# EAGLE board Rocket-Control (EAGLE 7.6.0)
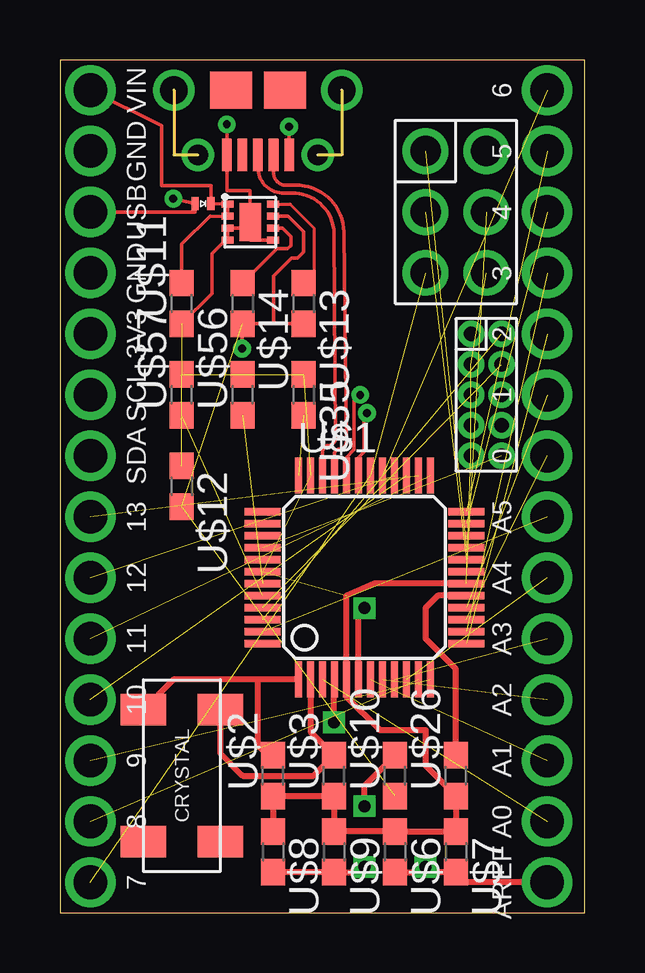
[diagram p0: board, top side]
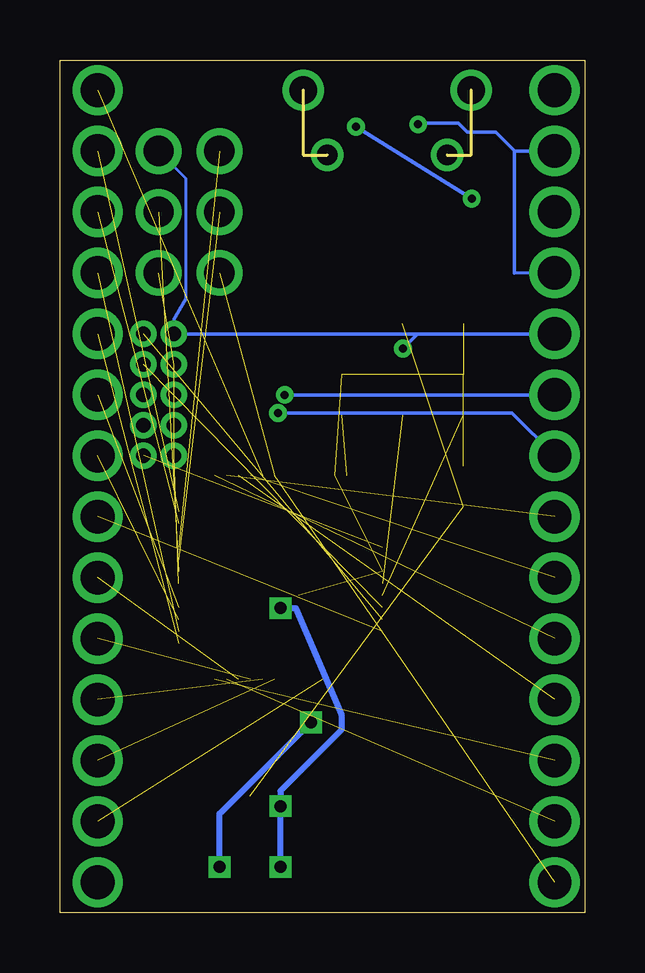
[diagram p1: board, bottom side, seen from below]

Size 21.89 x 35.55 mm. Coordinates in mm from the lower left corner, seen from the top.
Outline: 0,0 21.89,0 21.89,35.55 0,35.55 0,0
Copper layers (1*16): Top 0.035mm / dielectric 1.5mm / Bottom 0.035mm
Design rules "default": minimum track width 10mil, minimum drill 24mil, track to track 8mil, track to pad 8mil, pad to pad 8mil, via to via 8mil, smd to smd 8mil, copper to edge 40mil, drill to drill 8mil, minimum pad ring 10mil, minimum via ring 8mil, stop-mask expansion 4mil, vias tented up to drill 0mil, thermal gap 10mil

## Footprints (pad centres in the part's own frame; a part is rotated, then mirrored left to right if it is on the bottom)
TQFP48 = smd 0.3 x 1.5: 1 -2.75,-4.25; 2 -2.25,-4.25; 3 -1.75,-4.25; 4 -1.25,-4.25; 5 -0.75,-4.25; 6 -0.25,-4.25; 7 0.25,-4.25; 8 0.75,-4.25; 9 1.25,-4.25; 10 1.75,-4.25; 11 2.25,-4.25; 12 2.75,-4.25; 25 2.75,4.25; 26 2.25,4.25; 27 1.75,4.25; 28 1.25,4.25; 29 0.75,4.25; 30 0.25,4.25; 31 -0.25,4.25; 32 -0.75,4.25; 33 -1.25,4.25; 34 -1.75,4.25; 35 -2.25,4.25; 36 -2.75,4.25 | smd 1.5 x 0.3: 13 4.25,-2.75; 14 4.25,-2.25; 15 4.25,-1.75; 16 4.25,-1.25; 17 4.25,-0.75; 18 4.25,-0.25; 19 4.25,0.25; 20 4.25,0.75; 21 4.25,1.25; 22 4.25,1.75; 23 4.25,2.25; 24 4.25,2.75; 37 -4.25,2.75; 38 -4.25,2.25; 39 -4.25,1.75; 40 -4.25,1.25; 41 -4.25,0.75; 42 -4.25,0.25; 43 -4.25,-0.25; 44 -4.25,-0.75; 45 -4.25,-1.25; 46 -4.25,-1.75; 47 -4.25,-2.25; 48 -4.25,-2.75
C0603 = smd 1.1 x 1: 1 -0.85,0; 2 0.85,0
4-SOJ:CRYSTAL = smd 1.3 x 1.9: 1:CRYSTAL -2.75,1.6; 2:CRYSTAL -2.75,-1.6; 3:N/C 2.75,1.6; 4:N/C 2.75,-1.6
8-WFDFN-EXPOSED-PAD = smd 0.28 x 0.5: AGND 1.5,0; EN 1,0; FB 1.5,1.9; PG 0,1.9; PGND 0,0; SW 0.5,1.9; VIN 0.5,0; VOS 1,1.9 | smd 1.6 x 0.9: EXPOSED-THERMAL-PAD 0.75,0.95
SOD-882 = smd 0.3 x 0.55: P$1 0,0; P$2 0.65,0
HEADER-SIDE-A = drill 1.4: A0 0,-12.7; A1 0,-10.16; A2 0,-7.62; A3 0,-5.08; A4 0,-2.54; A5 0,0; AREF 0,-15.24; D0 0,2.54; D1 0,5.08; D2 0,7.62; D3 0,10.16; D4 0,12.7; D5 0,15.24; D6 0,17.78
HEADER-SIDE-B = drill 1.4: 3V3 -12.7,0; D7 -35.56,0; D8 -33.02,0; D9 -30.48,0; D10 -27.94,0; D11 -25.4,0; D12 -22.86,0; D13 -20.32,0; GND-IN -5.08,0; GND-OUT -10.16,0; SCL -15.24,0; SDA -17.78,0; USB -7.62,0; VIN -2.54,0
10118194-0001LF:MICRO-USB-B = smd 1.35 x 0.4: 1:VBUS 2.7,1.3; 2:D- 2.7,0.65; 3:D+ 2.7,0; 4:ID 2.7,-0.65; 5:GND 2.7,-1.3 | drill 0.85: NC1 2.7,2.5; NC6 2.7,-2.5 | drill 1.15: NC2 0,3.5; NC5 0,-3.5 | smd 1.55 x 1.75: NC3 0,1.125; NC4 0,-1.125
SPI-PORT = drill 1.27: ATN 0,0; GND 2.54,0; MISO 0,5.08; MOSI 2.54,2.54; SCK 0,2.54; VIN 2.54,5.08
JTAG-MINI = drill 0.6: GND-1 0.635,4.445; GND-2 0.635,3.175; GND-3 0.635,0.635; JTAG09 1.905,4.445; JTAG10 1.905,5.715; NC-1 0.635,1.905; NC-2 1.905,1.905; NC-3 1.905,3.175; RESET 1.905,0.635; VIN 0.635,5.715

## Placement (x,y rotation side)
U$1  ATSAML21G18B-AUT  [TQFP48]  12.7,13.97 0 top
U$2  CRYSTAL-CAPACITORS  [C0603]  8.89,5.71 90 top
U$3  CRYSTAL-CAPACITORS  [C0603]  11.43,5.71 90 top
U$4  CRYSTAL  [4-SOJ:CRYSTAL]  5.08,5.71 270 top
U$5  REGULATOR  [8-WFDFN-EXPOSED-PAD]  6.99,29.54 270 top
U$6  AREF-CAPACITORS  [C0603]  13.97,2.54 270 top
U$7  AREF-CAPACITORS  [C0603]  16.51,2.54 270 top
U$8  ANALOG-CAPACITORS  [C0603]  8.89,2.54 270 top
U$9  ANALOG-CAPACITORS  [C0603]  11.43,2.54 270 top
U$10  ANALOG-INDUCTOR  [C0603]  13.97,5.71 90 top
U$11  REGULATOR-CAPACITORS  [C0603]  5.08,25.4 90 top
U$12  REGULATOR-CAPACITORS  [C0603]  5.08,17.78 270 top
U$13  REGULATOR-INDUCTOR  [C0603]  10.16,25.4 270 top
U$14  REGULATOR-RESISTOR  [C0603]  7.62,25.4 270 top
U$15  REGULATION-DIODE  [SOD-882]  5.64,29.57 0 top
U$21  HEADER-SIDE-A  [HEADER-SIDE-A]  20.32,16.51 0 top
U$22  HEADER-SIDE-B  [HEADER-SIDE-B]  1.27,36.83 90 top
U$26  VDDIO-CAPACITOR  [C0603]  16.51,5.71 90 top
U$35  VDDIO-CAPACITOR  [C0603]  10.16,21.59 270 top
U$38  10118194-0001LF:MICRO-USB  [10118194-0001LF:MICRO-USB-B]  8.26,34.29 270 top
U$41  SPI-PORT  [SPI-PORT]  15.24,26.67 0 top
U$56  VDDCORE-CAPACITOR  [C0603]  7.62,21.59 90 top
U$57  VIN-CAPACITOR  [C0603]  5.08,21.59 90 top
U$61  JTAG-MINI  [JTAG-MINI]  16.51,18.41 0 top

## Library data of the parts
U$1-U$15 U$21 U$22 U$26 U$35 U$38 U$41 U$56 U$57 U$61 = RocketControlBoard

## Nets
+3V3: U$5.SW U$10.1 U$12.2 U$13.2 U$14.2 U$22.3V3 U$41.VIN U$61.VIN
A0: U$1.3 U$21.A0
A1: U$1.7 U$21.A1
A2: U$1.8 U$21.A2
A3: U$1.9 U$21.A3
A4: U$1.10 U$21.A4
A5: U$1.47 U$21.A5
ANALOG-VDD: U$1.6 U$8.2 U$9.2 U$10.2
AREF: U$1.4 U$6.2 U$7.2 U$21.AREF
CRYSTAL-A: U$1.1 U$2.2 U$4.2:CRYSTAL
CRYSTAL-B: U$1.2 U$3.2 U$4.1:CRYSTAL
D0-TX: U$1.15 U$21.D0
D1-RX: U$1.16 U$21.D1
D2: U$1.13 U$21.D2
D3: U$1.14 U$21.D3
D4: U$1.23 U$21.D4
D5: U$1.24 U$21.D5
D6: U$1.29 U$21.D6
D7: U$1.30 U$22.D7 U$41.ATN
D8: U$1.11 U$22.D8
D9: U$1.12 U$22.D9
D10: U$1.27 U$22.D10
D11: U$1.25 U$22.D11
D12: U$1.28 U$22.D12
D13: U$1.26 U$22.D13
GND: U$1.5 U$1.18 U$1.35 U$1.42 U$2.1 U$3.1 U$5.AGND U$5.EN U$5.EXPOSED-THERMAL-PAD U$5.FB U$6.1 U$7.1 U$8.1 U$9.1 U$11.1 U$12.1 U$22.GND-IN U$22.GND-OUT U$26.1 U$35.1 U$38.5:GND U$41.GND U$56.2 U$57.2 U$61.GND-1 U$61.GND-2 U$61.GND-3
MISO: U$1.21 U$41.MISO
MOSI: U$1.19 U$41.MOSI
N$1: U$5.PG U$13.1
N$3: U$5.VOS U$14.1
RX: U$1.38
SCK: U$1.20 U$41.SCK
SCL: U$1.32 U$22.SCL
SDA: U$1.31 U$22.SDA
SWD-06(RESET): U$1.40 U$61.RESET
SWD-09: U$1.45 U$61.JTAG09
SWD-10: U$1.46 U$61.JTAG10
TX: U$1.37
USB: U$15.P$1 U$22.USB U$38.1:VBUS
USB-N: U$1.33 U$38.2:D-
USB-P: U$1.34 U$38.3:D+
VDDCORE: U$1.43 U$56.1
VDDIO-A: U$1.17 U$26.2
VDDIO-B: U$1.36 U$35.2
VIN: U$5.PGND U$5.VIN U$11.2 U$15.P$2 U$22.VIN
VIN-REGULATED: U$1.44 U$57.1

## Tracks (layer width: path | path; a pad name or v marks a point on that pad's centre or on a via)
+3V3  (via drill 0.33)  (2 unrouted)
  Top 0.127: 8.91,24.59 8.89,24.56 7.63,24.56 U$14.2 7.59,24.52
  Top 0.152: U$5.SW 9.52,29.04 10.16,28.4 10.16,27.53 9.91,27.28 9.65,27.28 8.91,26.54 8.91,24.59 | U$14.2 U$13.2 | v7.59,23.52 7.59,24.52
  Bottom 0.127: U$61.VIN 17.14,24.74 16.64,25.6 16.64,30.61 U$41.VIN | U$22.3V3 6.99,24.13
  Bottom 0.152: U$22.3V3 U$61.VIN | 6.99,24.13 v7.59,23.52
A0  (1 unrouted)
A1  (1 unrouted)
A2  (1 unrouted)
A3  (1 unrouted)
A4  (1 unrouted)
A5  (1 unrouted)
ANALOG-VDD  (via drill 0.5)
  Top 0.254: U$8.2 U$9.2 12.48,1.69 v12.7,1.91 | v12.7,4.45 12.7,5.29 U$10.2 | U$1.6 12.45,12.45 v12.7,12.7
  Bottom 0.254: v12.7,1.91 v12.7,4.45 12.7,5.08 10.16,7.62 10.16,8.26 12.06,12.7 v12.7,12.7
AREF  (via drill 0.5)
  Top 0.254: U$6.2 15.03,1.69 v15.24,1.91 15.46,1.69 U$7.2 16.51,1.27 U$21.AREF | v11.43,7.94 11.43,9.7 U$1.4
  Bottom 0.254: v15.24,1.91 15.24,4.13 v11.43,7.94
CRYSTAL-A
  Top 0.254: U$1.1 8.26,9.72 | 8.26,9.72 4.74,9.72 U$4.2:CRYSTAL | U$2.2 8.68,6.57 8.26,6.99 8.26,9.72
CRYSTAL-B
  Top 0.254: U$4.1:CRYSTAL 6.68,6.66 7.62,5.71 10.58,5.71 U$3.2 10.45,7.54 U$1.2
D0-TX  (1 unrouted)
D1-RX  (1 unrouted)
D2  (1 unrouted)
D3  (1 unrouted)
D4  (1 unrouted)
D5  (1 unrouted)
D6  (1 unrouted)
D7  (2 unrouted)
D8  (1 unrouted)
D9  (1 unrouted)
D10  (1 unrouted)
D11  (1 unrouted)
D12  (1 unrouted)
D13  (1 unrouted)
GND  (via drill 0.33)  (11 unrouted)
  Top 0.127: U$5.AGND U$5.EN 7.93,28.54 | 7.93,28.04 U$5.EXPOSED-THERMAL-PAD | U$38.5:GND
  Top 0.152: U$5.FB 7.93,28.04 | 7.93,28.54 U$5.EXPOSED-THERMAL-PAD 7.93,30.1 6.96,30.1 U$38.5:GND | U$5.EN 7.98,28.54 7.98,28.83 | v6.96,32.87 U$38.5:GND | U$11.1 6.35,25.82 6.35,27.48 6.91,28.04 U$5.AGND
  Top 0.254: U$3.1 U$2.1 U$8.1 | U$1.18 13.09,13.72 11.95,13.22 U$1.5 11.95,9.01 13.34,7.62 15.24,7.62 15.24,6.13 U$26.1 U$7.1 U$6.1 U$9.1 U$3.1 | U$3.1 11.43,5.08
  Bottom 0.127: U$22.GND-OUT 2.95,26.67 | 2.95,31.75 2.95,31.77 | 6.91,32.92 v6.96,32.87
  Bottom 0.152: U$22.GND-IN 2.95,31.75 2.95,26.67 | 2.95,31.77 3.71,32.54 4.9,32.54 5.28,32.92 6.91,32.92
MISO  (1 unrouted)
MOSI  (1 unrouted)
N$1
  Top 0.127: U$5.PG 9.6,29.54 10.59,28.55 10.59,26.68 U$13.1
N$3
  Top 0.152: U$5.VOS 9.28,28.54 9.63,28.19 9.63,27.81 9.5,27.69 9.06,27.69 U$14.1
SCK  (1 unrouted)
SCL  (via drill 0.33)
  Top 0.152: U$1.32 11.95,18.99 12.27,19.3 12.27,21.34 v12.52,21.59
  Bottom 0.152: v12.52,21.59 U$22.SCL
SDA  (via drill 0.33)
  Top 0.152: U$1.31 12.45,18.98 12.68,19.2 12.68,20.7 v12.8,20.83
  Bottom 0.152: v12.8,20.83 3.05,20.83 U$22.SDA
SWD-06(RESET)  (1 unrouted)
SWD-09  (1 unrouted)
SWD-10  (1 unrouted)
USB  (via drill 0.33)
  Top 0.127: U$15.P$1 5.64,29.21 | U$38.1:VBUS
  Top 0.152: 5.64,29.21 U$22.USB | U$38.1:VBUS v9.55,32.77 | v4.72,29.77 U$15.P$1
  Bottom 0.152: v9.55,32.77 v4.72,29.77
USB-N
  Top 0.127: U$38.2:D- 8.9,30.87
  Top 0.152: 8.9,30.87 arc90 9.4,30.33 9.83,30.33 arc-90 11.84,28.37 11.94,19.63 arc-90 11.63,19.33 arc90 11.45,19.05 U$1.33
USB-P
  Top 0.127: U$38.3:D+ 8.26,31.17
  Top 0.152: 8.26,31.17 arc90 9.25,30 9.68,30 arc-90 11.43,28.32 11.48,19.76 arc-90 11.2,19.48 arc90 10.95,19.23 U$1.34
VDDCORE  (1 unrouted)
VDDIO-A
  Top 0.254: U$26.2 16.51,10.16 15.24,11.43 15.24,12.7 15.76,13.22 U$1.17
VDDIO-B  (1 unrouted)
VIN
  Top 0.127: U$15.P$2 6.31,29.54 U$5.PGND U$5.VIN 6.26,29.04
  Top 0.152: U$15.P$2 6.3,30.3 4.24,30.3 4.24,32.82 U$22.VIN | U$11.2 5.08,27.86 6.26,29.04
VIN-REGULATED  (1 unrouted)